# Altium PCB 12小马达模块OK.PcbDoc
Units mil, origin at the board's own origin, x right, y up, seen from the top; angles counter-clockwise.
Board outline 1168.96 x 939.58 mil, 2 copper layers (Top Layer, Bottom Layer); 3 components, 8 nets, 18 pads, 18 vias.
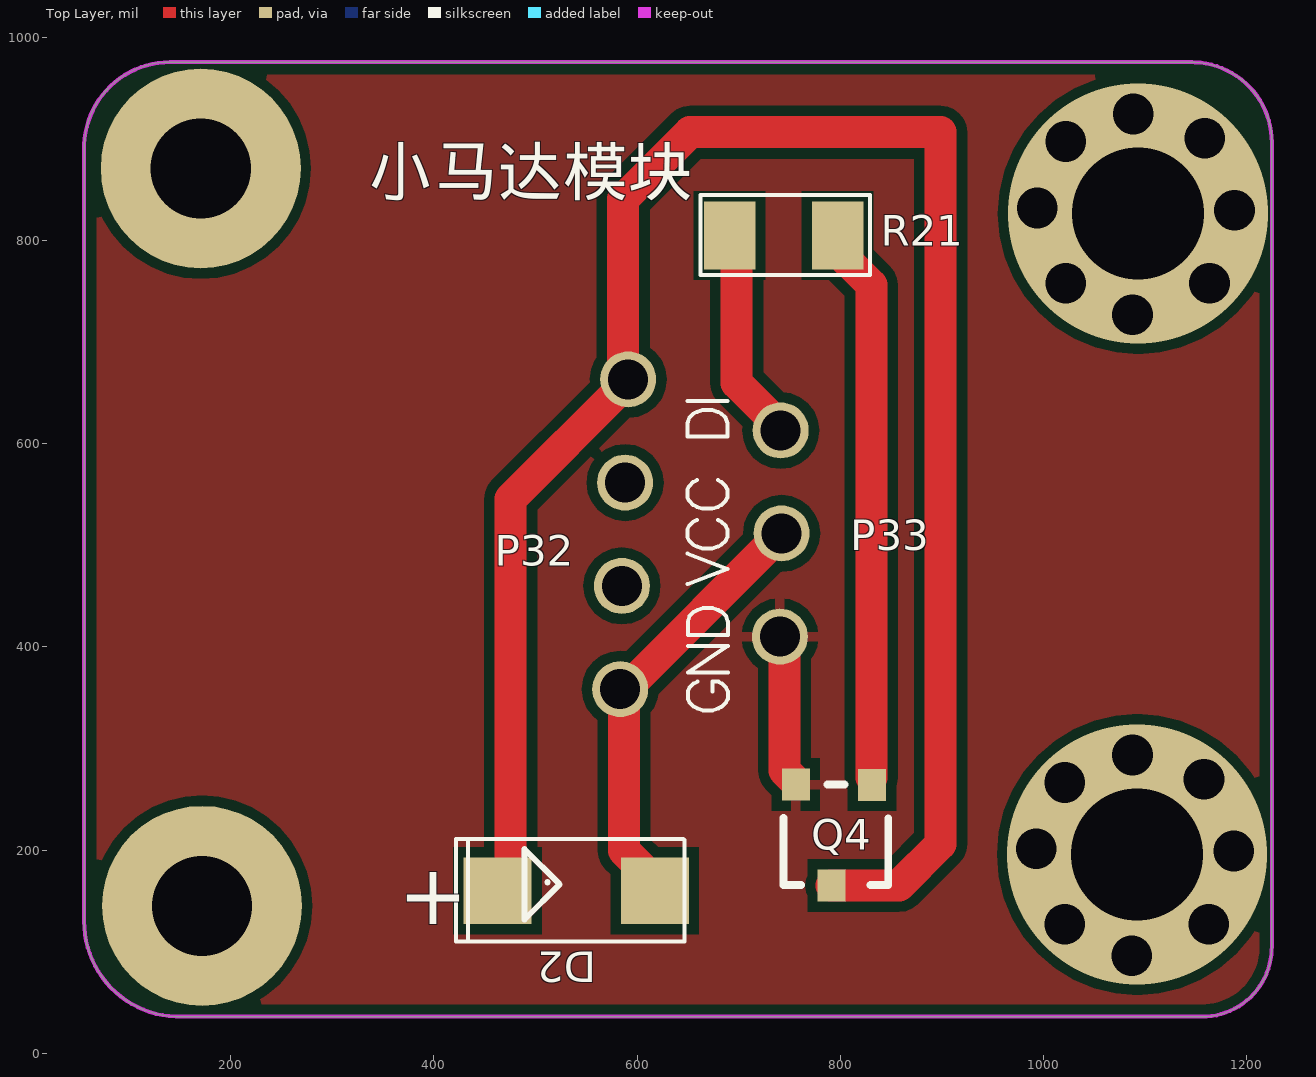
[diagram p0: Top Layer view]
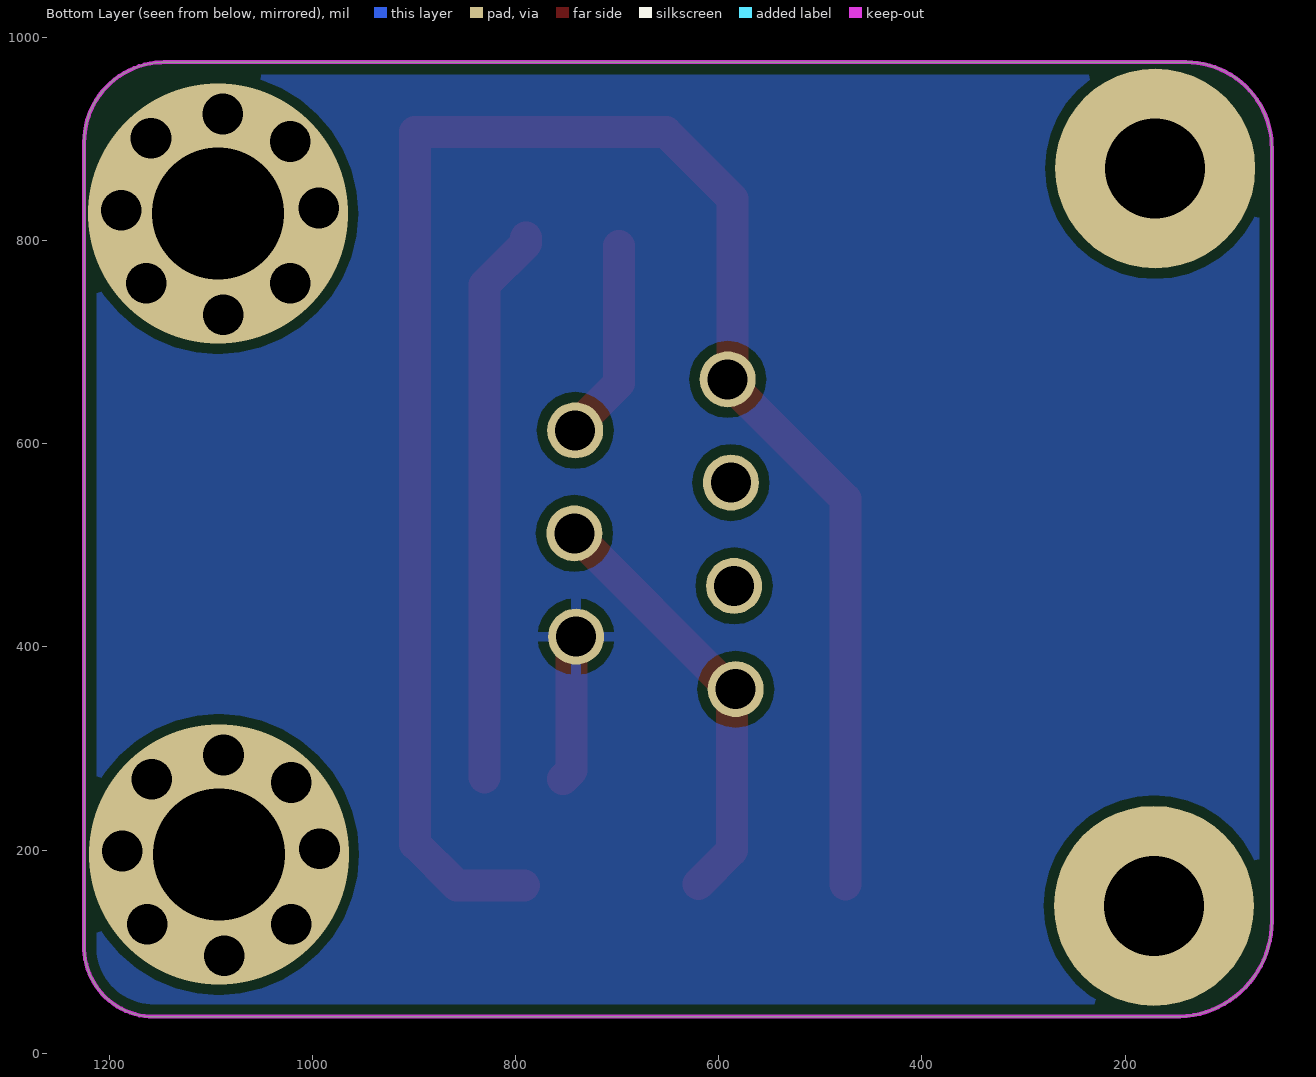
[diagram p1: Bottom Layer view, seen from below]

## Layer stack, top to bottom
Top Solder: solder mask 0.4, Solder Resist, Dk 3.5
Top Layer: signal copper 1.4
Dielectric1: dielectric 12.6, FR-4, Dk 4.8
Bottom Layer: signal copper 1.4
Bottom Solder: solder mask 0.4, Solder Resist, Dk 3.5

## Board outline
69.81,80.33 66.56,86.01 63.7,91.9 61.27,97.98 59.27,104.22 57.71,110.58 56.59,117.03 55.93,123.54 55.72,130.09 55.71,129.77 55.71,891.47 55.78,894.41 56.21,900.28 57.05,906.11 58.29,911.87 59.93,917.52 61.97,923.04 64.38,928.41 67.16,933.6 70.3,938.58 73.77,943.34 77.57,947.83 81.67,952.05 86.06,955.98 90.71,959.59 95.6,962.86 100.71,965.79 106.01,968.35 111.48,970.54 117.08,972.34 122.8,973.75 128.6,974.75 134.46,975.34 140.34,975.53 140.05,975.5 1145.91,975.5 1146.18,975.42 1148.92,975.36 1154.4,974.96 1159.84,974.18 1165.22,973.02 1170.5,971.48 1175.65,969.59 1180.67,967.34 1185.52,964.74 1190.17,961.81 1194.6,958.56 1198.8,955.02 1202.75,951.18 1206.41,947.09 1209.78,942.74 1212.84,938.18 1215.57,933.41 1217.97,928.46 1220.01,923.35 1221.69,918.12 1223,912.78 1223.94,907.36 1224.5,901.89 1224.67,896.4 1224.67,104.32 1224.61,101.92 1224.26,97.14 1223.58,92.4 1222.57,87.72 1221.23,83.13 1219.58,78.63 1217.62,74.27 1215.36,70.05 1212.81,65.99 1209.98,62.13 1206.89,58.47 1203.55,55.04 1199.98,51.85 1196.2,48.91 1192.22,46.25 1188.07,43.87 1183.76,41.79 1179.31,40.01 1174.75,38.54 1170.11,37.4 1165.39,36.59 1160.63,36.1 1155.84,35.95 1156.07,35.96 149.22,35.96 145.96,36.03 139.42,36.51 132.94,37.44 126.54,38.82 120.25,40.65 114.11,42.91 108.13,45.59 102.36,48.68 96.82,52.17 91.53,56.04 86.53,60.27 81.84,64.83 77.47,69.71 73.46,74.88

## Design rules (kind name [scope] priority, off if disabled: settings)
Clearance CAM_Clearance_2 [OnLayer('Top Layer')] p1: gap=10 ignorepadtopadclearanceinfootprint=FALSE except(0: Arc-Hole Track-Hole SMDPad-Hole THPad-Hole Via-Hole Fill-Hole Poly-Hole Region-Hole Text-Hole)
Clearance CAM_Clearance_1 [OnLayer('Bottom Layer')] p2: gap=10 ignorepadtopadclearanceinfootprint=FALSE except(0: Arc-Hole Track-Hole SMDPad-Hole THPad-Hole Via-Hole Fill-Hole Poly-Hole Region-Hole Text-Hole)
Clearance [All] p3: gap=10 ignorepadtopadclearanceinfootprint=FALSE except(0: Arc-Hole Track-Hole SMDPad-Hole THPad-Hole Via-Hole Fill-Hole Poly-Hole Region-Hole Text-Hole)
PolygonConnect [All] p1: connectstyle=Relief reliefconductorwidth=10 reliefentries=4 polygonreliefangle="90 Angle" airgapwidth=10
RoutingVias [All] p1: holewidth=28 width=50 viastyle="Through Hole" minholewidth=28 minwidth=50 maxholewidth=28 maxwidth=50
SilkToSolderMaskClearance SilkscreenOverComponentPads [IsPad] p1: minsilkscreentomaskgap=10 clearancetoexposedcopper=TRUE
SolderMaskExpansion [All] p1: expansion=4
Width CAM_Width_2 [OnLayer('Top Layer')] p1: maxlimit=32.5 minlimit=30.5 preferedwidth=31.5
Width CAM_Width_1 [OnLayer('Bottom Layer')] p2: maxlimit=11 minlimit=4 preferedwidth=5
Width [All] p3: maxlimit=10 minlimit=10 preferedwidth=10
29 further rules are at their usual default settings.

## Components (designator, comment, footprint, x,y, rotation, side; value= is the part's Value field where it differs from the comment)
D2 "SS14" DO-214AC/SMA 540,160 r180 top
Q4 "J3Y" sot23 796.54,215.08 r0 top
R21 "330R 5%" 1206 744.25,805 r0 top

## Footprints (in the part's own frame and the unit in brackets; to place one, negate y for a bottom-side part, rotate by r counter-clockwise, add the part's x,y. Pads: shape width x height; smd on the part's side, far side on the other; paste and mask are expansions set on the pad)
1206 [mm]
  rect 1.28x1.7 smd: 1(-1.35,0) 2(1.35,0)
  silkscreen extent -2.08,-0.99 2.16,1.02, body extent -1.6,-0.81 1.6,0.79, height 0.6
DO-214AC/SMA [mm]
  rect 1.7x1.67 smd: 1(1.965,0) 2(-1.965,0)
  silkscreen extent -2.71,-1.3 3,1.27, body extent -2.6,-1.3 2.6,1.3, height 2.4
sot23 [mil]
  rect 27.56x31.5 smd paste+0 mask+4: 1(-40.42,49.37) 1(-5,-50) 1(34.78,49.15)
  silkscreen extent -52,-49 51,49

## Free pads (board coordinates)
  rect 27.56x31.5 smd paste+0 mask+4: 1(756.12,264.45) 1(831.32,264.23)
  round 196.85 hole 98.43: 16(170.49,870.92) 16(171.74,145.07)
  round 55.12 hole 39.37: 17(583.35,358.35) 17(585,460) 17(588.1,561.65) 17(591.2,663.3) 17(740.5,410.08) 17(741.32,612.98) 17(742.15,511.73)

## Via types
v1: diameter 40, hole 40, Top Layer to Bottom Layer, 16 vias
v2: diameter 255.91, hole 129.92, Top Layer to Bottom Layer, 2 vias

## Nets (pads, with @x,y where several pads share a name; then routed paths per layer and width w, separated by ;. In a path a pad name is that pad's centre, name@x,y a point inside that pad or via, vN(x,y) a via of type N, cw(c..) or ccw(c..) an arc to the next point about the centre after c; other vN are vias at no path point)
$Net0: D2.2 pad.17@583.35,358.35 pad.17@742.15,511.73 | length 425
  Top Layer w31.5: pad.17@587.16,358.35 587.16,199.58 D2.2@620,166.74 ; pad.17@588.77,358.35 742.15,511.73 pad.17@745.05,511.73
$Net2: pad.17@741.32,612.98 R21.1 | length 210.7
  Top Layer w31.5: R21.1@697.99,794.65 697.99,659.67 747.98,609.68 pad.17@747.98,604.64
$Net3: D2.1 pad.17@591.2,663.3 Q4.1@791.54,165.08 | length 1883.5
  Top Layer w31.5: D2.1@475.49,166.32 475.49,545.49 pad.17@587.91,657.91 ; pad.17@586.33,659.5 586.33,840.91 651.96,906.54 898.82,906.54 ; Q4.1@791.54,165.08 857.77,165.08 898.82,206.13 898.82,906.11
$Net4: 
  other v1: 1086.74,96.13 1020.89,126.95 1162.56,126.95 1187.15,199.04 992.99,201.13 1020.9,266.54 1157.99,269.88 1087.56,293.64
  other v2: 1092.14,195.7
$Net5: 
  other v1: 1087.58,726.97 1021.74,757.79 1163.4,757.79 1187.99,829.89 993.83,831.97 1021.74,897.39 1158.83,900.72 1088.4,924.48
  other v2: 1092.99,826.54
$Net6: pad.1@831.32,264.23 Q4.1@831.32,264.23 R21.2 | length 548.6
  Top Layer w31.5: R21.2@789.65,802.98 789.65,797.15 830.49,756.32 Q4.1@830.49,271.32
$Net7: 
GND: pad.1@756.12,264.45 pad.17@740.5,410.08 Q4.1@756.12,264.45 | length 145.9
  Top Layer w31.5: pad.17@745.07,412.34 745.07,278.19 Q4.1@753.4,269.86

## Polygon pours and split planes (outlines as drawn)
GND on Top Layer "Top Layer-No Net" (solid, pour order 0): 69.81,80.33 66.56,86.01 63.7,91.9 61.27,97.98 59.27,104.22 57.71,110.58 56.59,117.03 55.93,123.54 55.72,130.09 55.71,129.77 55.71,891.47 55.78,894.41 56.21,900.28 57.05,906.11 58.29,911.87 59.93,917.52 61.97,923.04 64.38,928.41 67.16,933.6 70.3,938.58 73.77,943.34 77.57,947.83 81.67,952.05 86.06,955.98 90.71,959.59 95.6,962.86 100.71,965.79 106.01,968.35 111.48,970.54 117.08,972.34 122.8,973.75 128.6,974.75 134.46,975.34 140.34,975.53 140.05,975.5 1145.91,975.5 1146.18,975.42 1148.92,975.36 1154.4,974.96 1159.84,974.18 1165.22,973.02 1170.5,971.48 1175.65,969.59 1180.67,967.34 1185.52,964.74 1190.17,961.81 1194.6,958.56 1198.8,955.02 1202.75,951.18 1206.41,947.09 1209.78,942.74 1212.84,938.18 1215.57,933.41 1217.97,928.46 1220.01,923.35 1221.69,918.12 1223,912.78 1223.94,907.36 1224.5,901.89 1224.67,896.4 1224.67,104.32 1224.61,101.92 1224.26,97.14 1223.58,92.4 1222.57,87.72 1221.23,83.13 1219.58,78.63 1217.62,74.27 1215.36,70.05 1212.81,65.99 1209.98,62.13 1206.89,58.47 1203.55,55.04 1199.98,51.85 1196.2,48.91 1192.22,46.25 1188.07,43.87 1183.76,41.79 1179.31,40.01 1174.75,38.54 1170.11,37.4 1165.39,36.59 1160.63,36.1 1155.84,35.95 1156.07,35.96 149.22,35.96 145.96,36.03 139.42,36.51 132.94,37.44 126.54,38.82 120.25,40.65 114.11,42.91 108.13,45.59 102.36,48.68 96.82,52.17 91.53,56.04 86.53,60.27 81.84,64.83 77.47,69.71 73.46,74.88
GND on Bottom Layer "Top Layer-No Net1" (solid, pour order 1): 69.81,80.33 66.56,86.01 63.7,91.9 61.27,97.98 59.27,104.22 57.71,110.58 56.59,117.03 55.93,123.54 55.72,130.09 55.71,129.77 55.71,891.47 55.78,894.41 56.21,900.28 57.05,906.11 58.29,911.87 59.93,917.52 61.97,923.04 64.38,928.41 67.16,933.6 70.3,938.58 73.77,943.34 77.57,947.83 81.67,952.05 86.06,955.98 90.71,959.59 95.6,962.86 100.71,965.79 106.01,968.35 111.48,970.54 117.08,972.34 122.8,973.75 128.6,974.75 134.46,975.34 140.34,975.53 140.05,975.5 1145.91,975.5 1146.18,975.42 1148.92,975.36 1154.4,974.96 1159.84,974.18 1165.22,973.02 1170.5,971.48 1175.65,969.59 1180.67,967.34 1185.52,964.74 1190.17,961.81 1194.6,958.56 1198.8,955.02 1202.75,951.18 1206.41,947.09 1209.78,942.74 1212.84,938.18 1215.57,933.41 1217.97,928.46 1220.01,923.35 1221.69,918.12 1223,912.78 1223.94,907.36 1224.5,901.89 1224.67,896.4 1224.67,104.32 1224.61,101.92 1224.26,97.14 1223.58,92.4 1222.57,87.72 1221.23,83.13 1219.58,78.63 1217.62,74.27 1215.36,70.05 1212.81,65.99 1209.98,62.13 1206.89,58.47 1203.55,55.04 1199.98,51.85 1196.2,48.91 1192.22,46.25 1188.07,43.87 1183.76,41.79 1179.31,40.01 1174.75,38.54 1170.11,37.4 1165.39,36.59 1160.63,36.1 1155.84,35.95 1156.07,35.96 149.22,35.96 145.96,36.03 139.42,36.51 132.94,37.44 126.54,38.82 120.25,40.65 114.11,42.91 108.13,45.59 102.36,48.68 96.82,52.17 91.53,56.04 86.53,60.27 81.84,64.83 77.47,69.71 73.46,74.88

## Keep-outs
Keep-Out Layer:
  lines w3.94: 55.71,129.77 55.71,891.19 ; 55.72,130.09 55.93,123.54 56.59,117.03 57.71,110.58 59.27,104.22 61.27,97.98 63.7,91.9 66.56,86.01 69.81,80.33 73.46,74.88 77.47,69.71 81.84,64.83 86.53,60.27 91.53,56.04 96.82,52.17 102.36,48.68 108.13,45.59 114.11,42.91 120.25,40.65 126.54,38.82 132.94,37.44 139.42,36.51 145.96,36.03 149.22,35.96 ; 55.71,891.47 55.78,894.41 56.21,900.28 57.05,906.11 58.29,911.87 59.93,917.52 61.97,923.04 64.38,928.41 67.16,933.6 70.3,938.58 73.77,943.34 77.57,947.83 81.67,952.05 86.06,955.98 90.71,959.59 95.6,962.86 100.71,965.79 106.01,968.35 111.48,970.54 117.08,972.34 122.8,973.75 128.6,974.75 134.46,975.34 140.34,975.53 ; 140.05,975.5 1145.91,975.5 ; 149.53,35.96 1156.07,35.96 ; 1146.18,975.42 1148.92,975.36 1154.4,974.96 1159.84,974.18 1165.22,973.02 1170.5,971.48 1175.65,969.59 1180.67,967.34 1185.52,964.74 1190.17,961.81 1194.6,958.56 1198.8,955.02 1202.75,951.18 1206.41,947.09 1209.78,942.74 1212.84,938.18 1215.57,933.41 1217.97,928.46 1220.01,923.35 1221.69,918.12 1223,912.78 1223.94,907.36 1224.5,901.89 1224.67,896.4 ; 1155.84,35.95 1160.63,36.1 1165.39,36.59 1170.11,37.4 1174.75,38.54 1179.31,40.01 1183.76,41.79 1188.07,43.87 1192.22,46.25 1196.2,48.91 1199.98,51.85 1203.55,55.04 1206.89,58.47 1209.98,62.13 1212.81,65.99 1215.36,70.05 1217.62,74.27 1219.58,78.63 1221.23,83.13 1222.57,87.72 1223.58,92.4 1224.26,97.14 1224.61,101.92 1224.67,104.32 ; 1224.67,104.55 1224.67,896.67

## Silkscreen, mask and mechanical layers (free items; w line width, h text height)
Top Overlay:
  lines w3.94: 649.46,461.73 688.82,476.73 649.46,491.72 ; 649.47,642 688.83,642 ; 649.87,400.92 689.24,400.92 649.87,374.68 689.24,374.68 ; 658.83,524.9 655.08,523.03 651.33,519.28 649.46,515.53 649.46,508.03 651.33,504.28 655.08,500.53 658.83,498.66 664.45,496.79 673.82,496.79 679.45,498.66 683.2,500.53 686.95,504.28 688.82,508.03 688.82,515.53 686.95,519.28 683.2,523.03 679.45,524.9 ; 658.83,564.07 655.08,562.2 651.33,558.45 649.46,554.7 649.46,547.2 651.33,543.46 655.08,539.71 658.83,537.83 664.45,535.96 673.82,535.96 679.45,537.83 683.2,539.71 686.95,543.46 688.82,547.2 688.82,554.7 686.95,558.45 683.2,562.2 679.45,564.07 ; 659.25,365.68 655.5,363.81 651.75,360.06 649.87,356.31 649.87,348.81 651.75,345.06 655.5,341.32 659.25,339.44 664.87,337.57 674.24,337.57 679.86,339.44 683.61,341.32 687.36,345.06 689.24,348.81 689.24,356.31 687.36,360.06 683.61,363.81 679.86,365.68 674.24,365.68 674.24,356.31 ; 649.47,606.95 688.83,606.95 688.83,620.07 686.95,625.69 683.21,629.44 679.46,631.32 673.83,633.19 664.46,633.19 658.84,631.32 655.09,629.44 651.34,625.69 649.47,620.07 649.47,606.95 ; 649.87,411.79 689.24,411.79 689.24,424.91 687.36,430.54 683.61,434.28 679.86,436.16 674.24,438.03 664.87,438.03 659.25,436.16 655.5,434.28 651.75,430.54 649.87,424.91 649.87,411.79
  lines w5.91: 511.67,168.33 511.67,168.54 ; 523.33,166.67 489.15,200.85 489.15,131.66 523.78,166.29
  lines w7.87: 744.25,231.33 744.25,165.68 761.12,165.68 ; 787.37,264.43 804.25,264.43 ; 829.46,165.69 847.16,165.69 847.16,231.11
  text "小马达模块" at 335,829.89 h80
  text "P33" at 810,495 h30
  text "P32" at 460,480 h30
  text "+" at 365,126.95 h60